# Altium PCB TCA.PcbDoc
Units mm, origin at the board's own origin, x right, y up, seen from the top; angles counter-clockwise.
Board outline 25 x 75 mm, 4 copper layers (L1, L2, L3, L4), stack 1.741 mm thick; 65 components, 35 nets, 205 pads, 23 vias.
Unrouted connection lines stored in the file: 127.
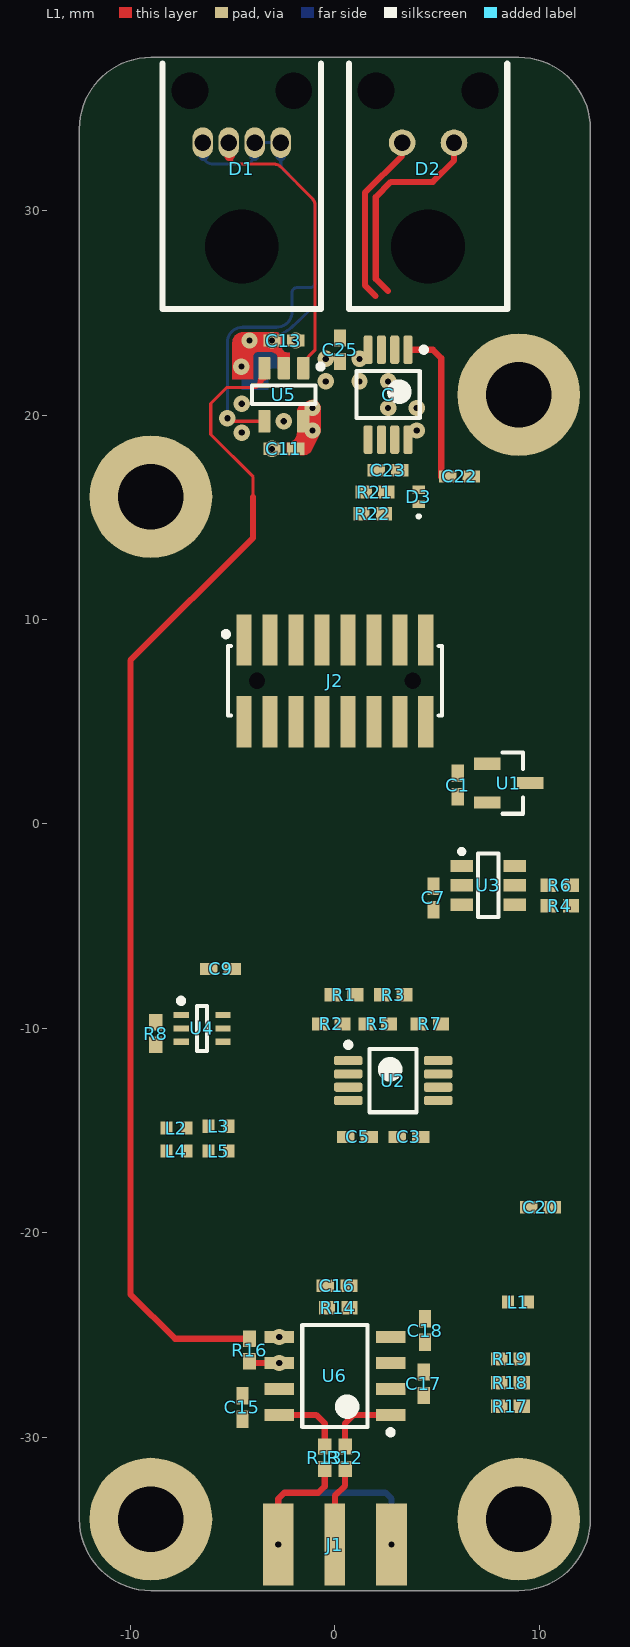
[diagram p0: L1 view]
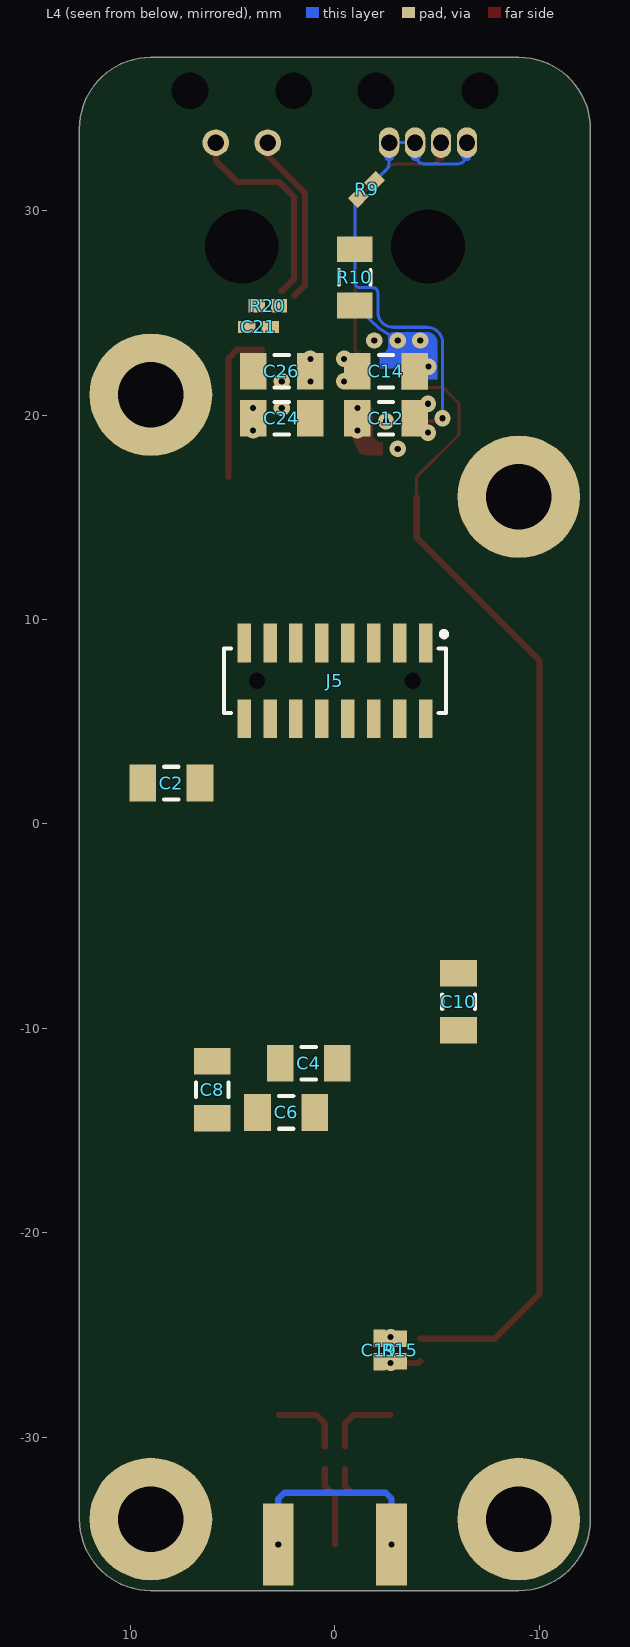
[diagram p1: L4 view, seen from below]
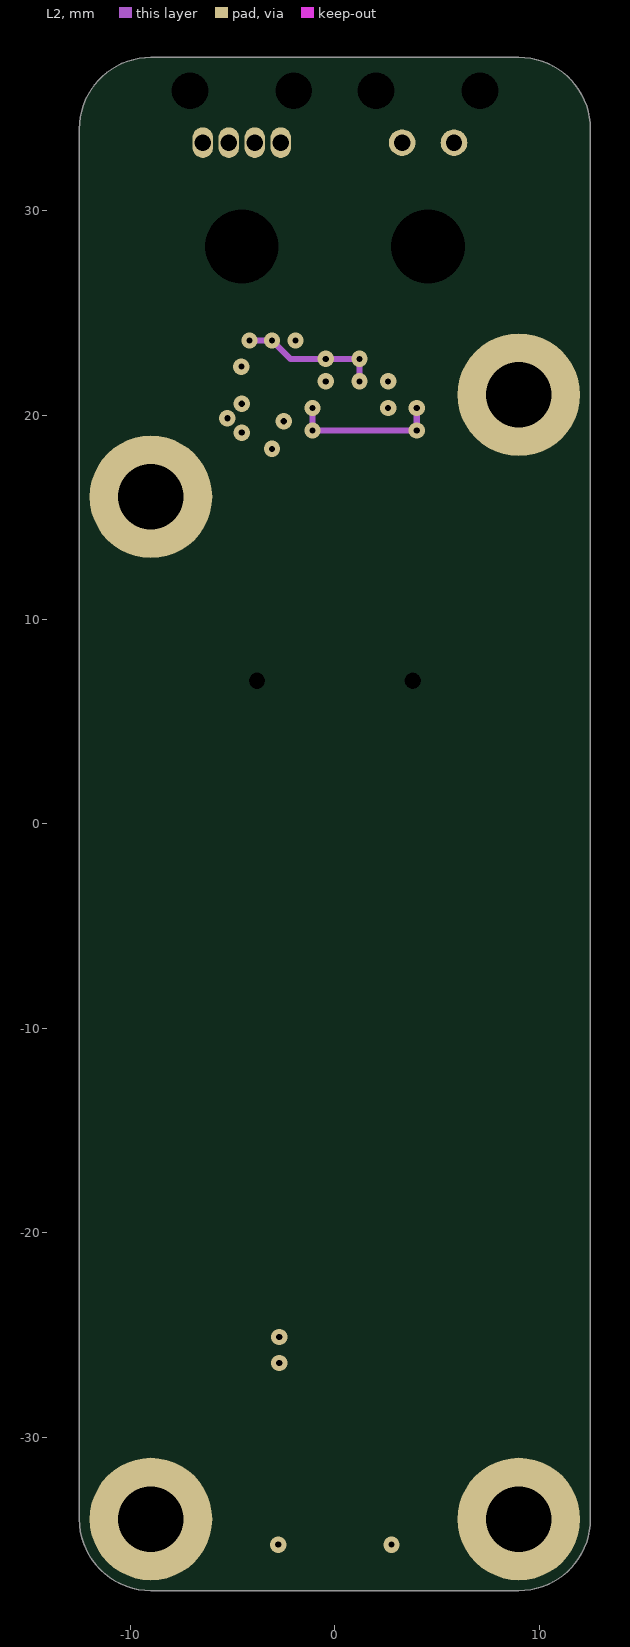
[diagram p2: L2]
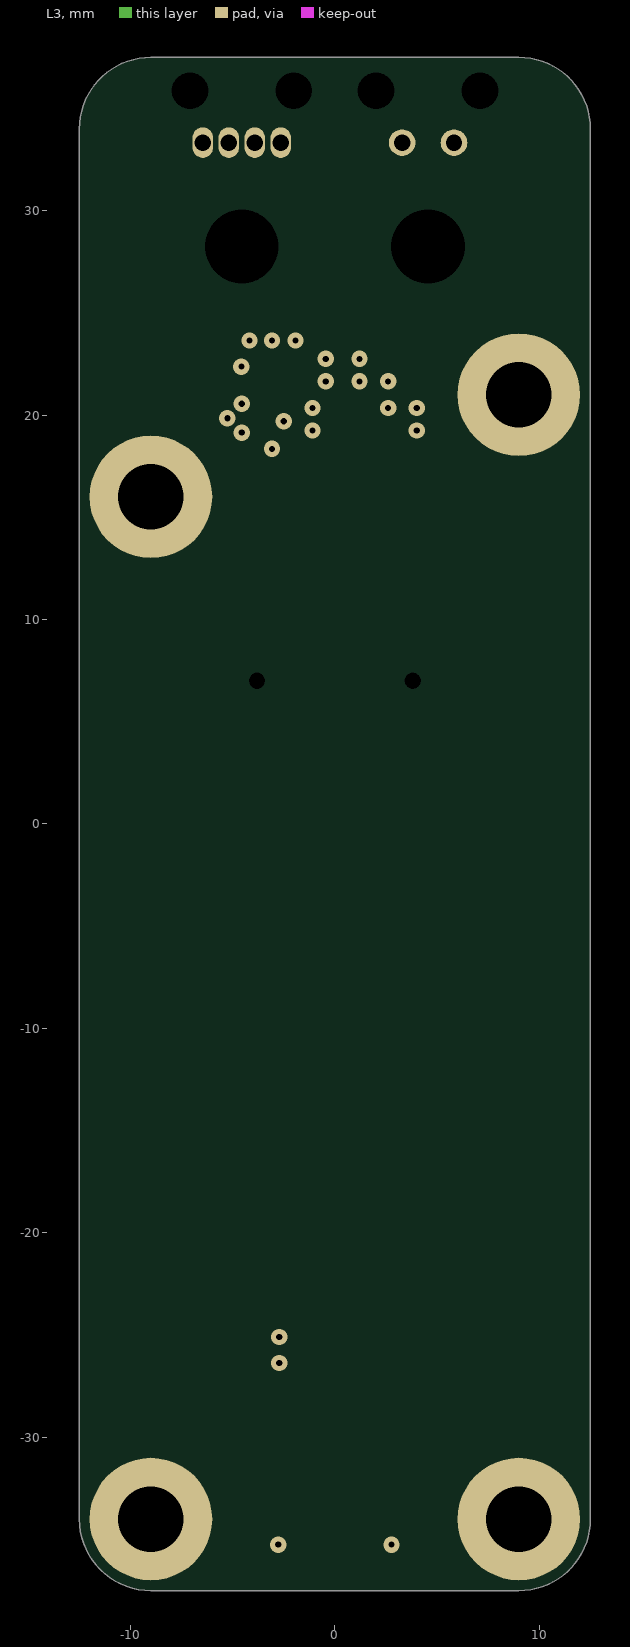
[diagram p3: L3]

## Layer stack, top to bottom
Top Solder: solder mask 0.0102, Solder Resist, Dk 3.5
L1: signal copper 0.0356
Dielectric 2: prepreg 0.1, PP-006, Dk 4.1
L2: signal copper 0.035
Dielectric 1: dielectric 1.4, FR-4, Dk 4.8
L3: signal copper 0.035
Dielectric 3: prepreg 0.1, PP-006, Dk 4.1
L4: signal copper 0.0356
Bottom Solder: solder mask 0.0102, Solder Resist, Dk 3.5

## Board outline
-12.5,-34 -12.5,34 cw(c-9,34) -9,37.5 9,37.5 cw(c9,34) 12.5,34 12.5,-34 cw(c9,-34) 9,-37.5 -9,-37.5 cw(c-9,-34)

## Design rules (kind name [scope] priority, off if disabled: settings)
Clearance [All] p1: gap=0.254 ignorepadtopadclearanceinfootprint=FALSE
PolygonConnect [All] p1: connectstyle=Relief reliefconductorwidth=0.254 reliefentries=4 polygonreliefangle="90 Angle" airgapwidth=0.254
RoutingVias [All] p1: holewidth=0.711 width=1.27 viastyle="Through Hole" minholewidth=0.711 minwidth=1.27 maxholewidth=0.711 maxwidth=1.27
SolderMaskExpansion [All] p1: expansion=0 istentingtop=FALSE
Width [All] p1: maxlimit=1 minlimit=0.15 preferedwidth=0.15
30 further rules are at their usual default settings.

## Classes and differential pairs
net class S50: OUT
component class FE: C15 C16 C17 C18 C19 C20 J1 L1 R12 R13 R14 R15 R16 R17 R18 R19 U6
component class EO: C11 C12 C13 C14 D1 R9 R10 U5
component class DR: C C21 C22 C23 C24 C25 C26 D2 D3 R20 R21 R22
component class CONN: J2 J5 L2 L3 L4 L5
component class AB: C1 C2 C3 C4 C5 C6 C7 C8 C9 C10 R1 R2 R3 R4 R5 R6 R7 R8 U1 U2 U3 U4

## Components (designator, comment, footprint, x,y, rotation, side; value= is the part's Value field where it differs from the comment)
C "LM7332MMX/NOPB" TEXASINSTRUMENTS_PKG_DGK0008A 2.6,21 r270 top (schematic designator U7)
C1 "100n,10%,25V,X7R,0402" CAPC1005X06N 6.014,1.907 r90 top value=100nF
C2 "10u,20%,50V,X5R,1206" CAPC3216X16N 8,2 r180 bottom value=10u
C3 "100n,10%,25V,X7R,0402" CAPC1005X06N 3.621,-15.307 r0 top value=100nF
C4 "10u,20%,50V,X5R,1206" CAPC3216X16N 1.28,-11.699 r180 bottom value=10u
C5 "100n,10%,25V,X7R,0402" CAPC1005X06N 1.113,-15.307 r0 top value=100nF
C6 "10u,20%,50V,X5R,1206" CAPC3216X16N 2.388,-14.107 r180 bottom value=10u
C7 "100n,10%,25V,X7R,0402" CAPC1005X06N 4.817,-3.62 r270 top value=100nF
C8 "10u,20%,50V,X5R,1206" CAPC3216X16N 6,-13 r90 bottom value=10u
C9 "100n,10%,25V,X7R,0402" CAPC1005X06N -5.594,-7.092 r0 top value=100nF
C10 "10u,20%,50V,X5R,1206" CAPC3216X16N -6.05,-8.696 r270 bottom value=10u
C11 "100n,10%,25V,X7R,0402" CAPC1005X06N -2.5,18.35 r0 top value=100nF
C12 "10u,20%,50V,X5R,1206" CAPC3216X16N -2.5,19.85 r0 bottom value=10u
C13 "100n,10%,25V,X7R,0402" CAPC1005X06N -2.5,23.65 r180 top value=100nF
C14 "10u,20%,50V,X5R,1206" CAPC3216X16N -2.5,22.15 r180 bottom value=10u
C15 "100n,10%,25V,X7R,0402" CAPC1005X06N -4.522,-28.535 r90 top value=100nF
C16 "Omit,0402" CAPC1005X06N 0.111,-22.582 r180 top value=Omit
C17 "100n,10%,25V,X7R,0402" CAPC1005X06N 4.351,-27.379 r90 top value=100nF
C18 "100n,10%,25V,X7R,0402" CAPC1005X06N 4.409,-24.784 r90 top value=100nF
C19 "Omit,0402" CAPC1005X06N -2.175,-25.73 r270 bottom value=Omit
C20 "100n,10%,25V,X7R,0402" CAPC1005X06N 10.057,-18.753 r0 top value=100nF
C21 "100n,10%,25V,X7R,0402" CAPC1005X06N 3.733,24.313 r0 bottom value=100nF
C22 "100n,10%,25V,X7R,0402" CAPC1005X06N 6.1,17 r180 top value=100nF
C23 "100n,10%,25V,X7R,0402" CAPC1005X06N 2.6,17.3 r0 top value=100nF
C24 "10u,20%,50V,X5R,1206" CAPC3216X16N 2.6,19.85 r0 bottom value=10u
C25 "100n,10%,25V,X7R,0402" CAPC1005X06N 0.25,23.2 r90 top value=100nF
C26 "10u,20%,50V,X5R,1206" CAPC3216X16N 2.6,22.15 r180 bottom value=10u
D1 "IF-E99B" INDUSTRIALFIBEROPTICS_IF-E99B -4.555,33.33 r0 top locked
D2 "IF D91B" INDUSTRIALFIBEROPTICS_IF-D91B 4.555,33.33 r0 top locked
D3 "CDBQR0130R" DFN65P100X50-2N 4.1,16 r90 top
J1 "CON-SMA-EDGE-S" RFSOLUTIONS_CON-SMA-EDGE-S 0,-35.75 r180 top locked
J2 "HX PZ1.27-2x8P TP" "HANXIA_HX PZ1.27-2x8P TP" 0,7 r90 top locked
J5 "PM127-2-08-S-4.3" HCTL_PM127-2-08-S-4.3 0,7 r270 bottom locked
L1 "470R,0402" INDC1005X05N 8.958,-23.387 r0 top value=470
L2 "470R" INDC1005X05N -7.75,-14.877 r0 top
L3 "470R" INDC1005X05N -5.692,-14.784 r0 top
L4 "470R" INDC1005X05N -7.75,-16 r0 top
L5 "470R" INDC1005X05N -5.692,-16 r0 top
R1 "1k,0.1%,0.063W,0402" RESC1005X04N 0.442,-8.349 r0 top value=1k
R2 "1k,0.1%,0.063W,0402" RESC1005X04N -0.176,-9.783 r0 top value=1k
R3 "1k,0.1%,0.063W,0402" RESC1005X04N 2.85,-8.349 r0 top value=1k
R4 "10k,5%,0.063W,0402" RESC1005X04N 11,-4 r0 top value=10k
R5 "1k,0.1%,0.063W,0402" RESC1005X04N 2.098,-9.783 r0 top value=1k
R6 "10k,5%,0.063W,0402" RESC1005X04N 11,-3 r0 top value=10k
R7 "1k,0.1%,0.063W,0402" RESC1005X04N 4.64,-9.783 r0 top value=1k
R8 "1k,0.1%,0.063W,0402" RESC1005X04N -8.759,-10.25 r90 top value=1k
R9 "0R0,0402" RESC1005X04N -1.547,31.039 r135 bottom value=0
R10 "499R,0.1%,0.52W,1206" VISHAY_PKG_TNPW1206 -0.974,26.739 r90 bottom value=499R
R12 "10R,1%,0.063W,0402" RESC1005X04N 0.5,-31 r90 top value=10R
R13 "10R,1%,0.063W,0402" RESC1005X04N -0.5,-31 r90 top value=10R
R14 "Omit" RESC1005X04N 0.162,-23.66 r180 top
R15 "0R0,0402" RESC1005X04N -3.2,-25.73 r270 bottom value=0
R16 "49R9,1%,0.063W,0402" RESC1005X04N -4.175,-25.73 r90 top value=49R9
R17 "1k,0.1%,0.063W,0402" RESC1005X04N 8.581,-28.483 r0 top value=1k
R18 "1k,0.1%,0.063W,0402" RESC1005X04N 8.581,-27.325 r0 top value=1k
R19 "1k,0.1%,0.063W,0402" RESC1005X04N 8.581,-26.167 r0 top value=1k
R20 "1k,0.1%,0.063W,0402" RESC1005X04N 3.282,25.345 r180 bottom value=1k
R21 "1k,0.1%,0.063W,0402" RESC1005X04N 1.956,16.236 r0 top value=1k
R22 "10k,5%,0.063W,0402" RESC1005X04N 1.85,15.179 r180 top value=10k
U1 "REF3030AIDBZR" SOT95P237X112-3N 8.5,2 r0 top
U2 "LM7332MMX/NOPB" TEXASINSTRUMENTS_PKG_DGK0008A 2.85,-12.55 r0 top
U3 "MCP4725A0T-E/CH" SOTFL95P260X145-6 7.5,-3 r0 top
U4 "LMV7239M7X/NOPB" SOTFL65P210X110-6N -6.5,-10 r0 top
U5 "LMH6609MF/NOPB" TEXASINSTRUMENTS_PKG_DBV0005A -2.5,21 r270 top
U6 "AD8130ARZ" ANALOGDEVICES_PKG_R-8 0,-27 r180 top

## Footprints (in the part's own frame and the unit in brackets; to place one, negate y for a bottom-side part, rotate by r counter-clockwise, add the part's x,y. Pads: shape width x height; smd on the part's side, far side on the other; paste and mask are expansions set on the pad)
ANALOGDEVICES_PKG_R-8 [mm]
  rect 1.45x0.6 smd: 1(-2.725,1.905) 2(-2.725,0.635) 3(-2.725,-0.635) 4(-2.725,-1.905) 5(2.725,-1.905) 6(2.725,-0.635) 7(2.725,0.635) 8(2.725,1.905)
  silkscreen extent -2.85,-2.5 1.6,2.88, body extent -2,-2.5 2,2.5, height 1.75
CAPC1005X06N [mm]
  rect 0.85x0.6 smd: 1(-0.575,0) 2(0.575,0)
  body extent -0.53,-0.28 0.53,0.27, height 0.55
CAPC3216X16N [mm] "Chip Capacitor, 2-Leads, Body 3.20x1.60mm, IPC Medium Density"
  rect 1.3x1.8 smd: 1(-1.4,0) 2(1.4,0)
  silkscreen extent -0.35,-0.8 0.35,0.8, body extent -1.75,-0.95 1.75,0.95, height 1.6
DFN65P100X50-2N [mm] "DFN, 2-Leads, Body 0.60x1.00mm, Pitch 0.65mm, IPC Medium Density"
  rect 0.4x0.6 smd: 1(-0.35,0) 2(0.35,0)
  silkscreen extent -1,-0.05 -0.9,0.05, body extent -0.5,-0.3 0.5,0.3, height 0.5
"HANXIA_HX PZ1.27-2x8P TP" [mm]
  rect 2.5x0.74 smd: 1(2,4.445) 2(-2,4.445) 3(2,3.175) 4(-2,3.175) 5(2,1.905) 6(-2,1.905) 7(2,0.635) 8(-2,0.635) 9(2,-0.635) 10(-2,-0.635) 11(2,-1.905) 12(-2,-1.905) 13(2,-3.175) 14(-2,-3.175) 15(2,-4.445) 16(-2,-4.445)
  silkscreen extent -1.7,-5.23 2.41,5.46, body extent -1.7,-5.23 1.7,5.23, height 4.8
HCTL_PM127-2-08-S-4.3 [mm]
  rect 1.9x0.66 smd: 1(-1.85,4.445) 2(1.85,4.445) 3(-1.85,3.175) 4(1.85,3.175) 5(-1.85,1.905) 6(1.85,1.905) 7(-1.85,0.635) 8(1.85,0.635) 9(-1.85,-0.635) 10(1.85,-0.635) 11(-1.85,-1.905) 12(1.85,-1.905) 13(-1.85,-3.175) 14(1.85,-3.175) 15(-1.85,-4.445) 16(1.85,-4.445)
  round 0 hole 0.8 unplated: ""(0,-3.81) ""(0,3.81)
  silkscreen extent -2.41,-5.43 1.57,5.46, body extent -1.58,-5.43 1.57,5.43, height 4.8
INDC1005X05N [mm] "Chip Inductor, 2-Leads, Body 1.00x0.50mm, IPC Medium Density"
  rect 0.57x0.64 smd: 1(-0.49,0) 2(0.49,0)
  body extent -0.5,-0.25 0.5,0.25, height 0.5
INDUSTRIALFIBEROPTICS_IF-D91B [mm]
  round 1.3 hole 0.8 mask+0: 1(-1.27,0) 2(1.27,0)
  round 0 hole 1.8 unplated mask+0: ""(-2.54,2.54) ""(2.54,2.54)
  round 0 hole 3.6 unplated mask+0: ""(0,-5.08)
  silkscreen extent -3.87,-8.14 3.87,3.86, body extent -4.31,-8.31 4.31,19.44, height 11.3
INDUSTRIALFIBEROPTICS_IF-E99B [mm]
  oval 1x1.5 hole 0.8 mask+0: 1(1.905,0) 2(0.635,0) 3(-0.635,0) 4(-1.905,0)
  round 0 hole 1.8 unplated mask+0: ""(-2.54,2.54) ""(2.54,2.54)
  round 0 hole 3.6 unplated mask+0: ""(0,-5.08)
  silkscreen extent -3.87,-8.14 3.87,3.86, body extent -4.32,-8.31 4.32,19.44, height 11.3
RESC1005X04N [mm] "Chip Resistor, 2-Leads, Body 1.0x0.5mm, IPC Medium Density"
  rect 0.8x0.65 smd: 1(-0.55,0) 2(0.55,0)
  body extent -0.52,-0.27 0.53,0.28, height 0.4
RFSOLUTIONS_CON-SMA-EDGE-S [mm]
  rect 1x4 smd: 1(0,-0.5)
  rect 1.5x4 smd: 2(-2.77,-0.5) 2(2.77,-0.5)
  rect 1.5x4 smd far side: 2(-2.77,-0.5) 2(2.77,-0.5)
  body extent -3.18,-2.06 3.18,11.27, height 3.55
SOT95P237X112-3N [mm] "SOT23, 3-Leads, Body 2.92x2.37mm, Pitch 0.95mm, IPC Medium Density"
  rect 1.3x0.6 smd: 1(-1.05,0.95) 2(-1.05,-0.95) 3(1.05,0)
  silkscreen extent -0.3,-1.5 0.7,1.5, body extent -0.7,-1.52 0.7,1.52, height 1.12
SOTFL65P210X110-6N [mm] "SOT363, 6-Leads, Body 2.2x2.2mm (max), Pitch 0.65mm, IPC Medium Density"
  rect 0.75x0.3 smd: 1(-1.025,0.65) 2(-1.025,0) 3(-1.025,-0.65) 4(1.025,-0.65) 5(1.025,0) 6(1.025,0.65)
  silkscreen extent -1.15,-1.1 0.25,1.47, body extent -0.67,-1.1 0.67,1.1, height 1.1
SOTFL95P260X145-6 [mm] "SOT23, 6-Leads, Body 2.90x2.80mm, Pitch 0.95mm"
  rect 1.1x0.6 smd: 1(-1.3,0.95) 2(-1.3,0) 3(-1.3,-0.95) 4(1.3,-0.95) 5(1.3,0) 6(1.3,0.95)
  silkscreen extent -1.4,-1.55 0.5,1.75, body extent -1.5,-1.53 1.5,1.53, height 1.1
TEXASINSTRUMENTS_PKG_DBV0005A [mm] "SOT23, 5-Leads, Body 2.90x2.80mm, Pitch 0.95mm"
  rrect17% 1.1x0.6 smd mask+0.07: 1(-1.3,0.95) 2(-1.3,0) 3(-1.3,-0.95) 4(1.3,-0.95) 5(1.3,0.95)
  silkscreen extent -1.5,-1.55 0.45,1.93, body extent -1.4,-1.45 1.4,1.45, height 1.2
TEXASINSTRUMENTS_PKG_DGK0008A [mm]
  rrect50% 1.4x0.45 smd: 1(-2.2,0.975) 2(-2.2,0.325) 3(-2.2,-0.325) 4(-2.2,-0.975) 5(2.2,-0.975) 6(2.2,-0.325) 7(2.2,0.325) 8(2.2,0.975)
  silkscreen extent -2.32,-1.55 1.15,1.88, body extent -2.45,-1.55 2.45,1.55, height 1.1
VISHAY_PKG_TNPW1206 [mm]
  rect 1.25x1.75 smd: 1(-1.375,0) 2(1.375,0)
  silkscreen extent -0.35,-0.77 0.35,0.77, body extent -1.65,-0.87 1.65,0.88, height 0.65

## Part data
C U2: library part LM7332MMX_NOPB, "General Purpose Amplifier 2 Circuit Rail-to-Rail 8-VSSOP", Manufacturer 1="Texas Instruments", Vendor 1 Part Number=296-LM7332MMX/NOPBCT-ND, CreatedBy="Judd Foster", HelpURL=https://www.ti.com/lit/ds/symlink/lm7332.pdf?HQS=dis-dk-null-digikeymode-dsf-pf-null-wwe&ts=1730932081789&ref_url=https%253A%252F%252Fwww.ti.com%252Fgeneral%252Fdocs%252Fsuppproductinfo.tsp%253FdistId%253D10%2526gotoUrl%253Dhttps%253A%252F%252Fwww.ti.com%, Manufacturer 1 Part Number=LM7332MMX/NOPB, Part Name=LM7332MMX_NOPB, Vendor 1=DigiKey
C1 C3 C5 C7 C9 C11 C13 C15 C17 C18 C20 C21 C22 C23 C25: library part CAP,Cer,100nF,10%,25V,X7R,0402, "0.1ï¿½F ï¿½10% 25V Ceramic Capacitor X7R 0402 (1005 Metric)", Manufacturer 1="Murata Electronics", Manufacturer 1 Part Number=GRM155R71E104KE14J, Vendor 1 Part Number=490-14603-1-ND, CreatedBy="Judd Foster", HelpURL=https://search.murata.co.jp/Ceramy/image/img/A01X/G101/ENG/GRM155R71E104KE14-01.pdf, Part Name=CAP,Cer,100nF,10%,25V,X7R,0402, Vendor 1=DigiKey
C2 C4 C6 C8 C10 C12 C14 C24 C26: library part CAP,Cer,10uF,50VDC,X5R,1206, "10ï¿½F ï¿½20% 50V Ceramic Capacitor X5R 1206 (3216 Metric)", Manufacturer 1="Samsung Electro-Mechanics", Manufacturer 1 Part Number=CL31A106MBHNNNE, Vendor 1 Part Number=1276-6736-1-ND, CreatedBy="Judd Foster", HelpURL=https://www.samsungsem.com/resources/file/global/support/product_catalog/MLCC.pdf, Part Name=CAP,Cer,10uF,50VDC,X5R,1206, Vendor 1=Digikey
C16 C19: library part CAP,Omit,0402, "Omit", Manufacturer 1=N/A, CreatedBy="Judd Foster", HelpURL=N/A, Manufacturer 1 Part Number=N/A, Part Name=CAP,Omit,0402, Vendor 1=N/A, Vendor 1 Part Number=N/A
D1: library part "XMITTER,FIBER OPTIC,650NM,1.9V,IF-E99B", "Fiber Optic Transmitter 650nm 1.9V 50 mA Connector-less", Manufacturer 1="Industrial Fiber Optics", Vendor 1 Part Number=FB161-ND, CreatedBy="Judd Foster", HelpURL=https://i-fiberoptics.com/pdf/if-e99bdatasheet.pdf, Manufacturer 1 Part Number=IF-E99B, Part Name="XMITTER,FIBER OPTIC,650NM,1.9V,IF-E99B", Vendor 1=DigiKey
D2: library part "RECEIVER,FIBER OPTIC,450-1050NM,IF-D91B", "Fiber Optic Receiver General Purpose 100Mbps", Manufacturer 1="Industrial Fiber Optics", Vendor 1 Part Number=FB200-ND, CreatedBy="Judd Foster", HelpURL=https://i-fiberoptics.com/pdf/ifd91b-1809.pdf, Manufacturer 1 Part Number="IF D91B", Part Name="RECEIVER,FIBER OPTIC,450-1050NM,IF-D91B", Vendor 1=DigiKey
D3: library part DIODE,Schottky,30V,100mA,SMD, "Diode 30 V 100mA Surface Mount 0402C/SOD-923F", Manufacturer 1="Comchip Technology", Vendor 1 Part Number=641-1272-1-ND, CreatedBy="Judd Foster", HelpURL=https://mm.digikey.com/Volume0/opasdata/d220001/medias/docus/3209/CDBQR0130R.pdf, Manufacturer 1 Part Number=CDBQR0130R, Part Name=DIODE,Schottky,30V,100mA,SMD, Vendor 1=Digikey
J1: library part Conn,RF,SMA,Fem,50R,Edge,SMD, "SMA Connector Jack, Female Socket Board Edge, End Launch Solder", Manufacturer 1="RF Solutions", Vendor 1 Part Number=CON-SMA-EDGE-S-ND, CreatedBy="Judd Foster", HelpURL=https://www.rfsolutions.co.uk/content/download-files/CON-SMA-EDGE-6-DATASHEET.pdf, Manufacturer 1 Part Number=CON-SMA-EDGE-S, Part Name=Conn,RF,SMA,Fem,50R,Edge,SMD, Vendor 1=DigiKey
J2: library part "CONN,Hdr,2x8 Pin,1.27mm,SMD", "CONN HEADER 16POS 1.27mm DUAL ROW SMD", Manufacturer 1=hanxia, Vendor 1 Part Number=C41376040, CreatedBy="Judd Foster", HelpURL=https://www.lcsc.com/datasheet/C41376040.pdf?spm=wm.sxq.inf.ggs___wm.fly.bg.0.xh&lcsc_vid=T1ELXwUHQlNYVlZRE1JdXlRQFVgNBF1eTlFXBVxWRAAxVlNeQ1lYVlFUQlNXXjsOAxUeFF5JWBYZEEoKFBINSQcJGk4eFQsCAgIaSgADAwAHC0slRFhZUlVVQ08GEwkK, Manufacturer 1 Part Number="HX PZ1.27-2x8P TP", Part Name="CONN,Hdr,2x8 Pin,1.27mm,SMD", Vendor 1=LCSC
J5: library part "CONN,Rcpt,2x8 Pin,1.27mm,SMD", "CONN SOCKET 16POS 1.27mm DUAL ROW SMD", Manufacturer 1=HCTL, Vendor 1 Part Number=C3975134, CreatedBy="Judd Foster", HelpURL=https://www.lcsc.com/datasheet/C3975134.pdf?spm=wm.sxq.inf.ggs___wm.fly.bg.0.xh&lcsc_vid=T1ELXwUHQlNYVlZRE1JdXlRQFVgNBF1eTlFXBVxWRAAxVlNeQ1lYVldfR1VbXjsOAxUeFF5JWBYZEEoKFBINSQcJGk4dAgUUFAk%3D, Manufacturer 1 Part Number=PM127-2-08-S-4.3, Part Name="CONN,Rcpt,2x8 Pin,1.27mm,SMD", Vendor 1=LCSC
L1 L2 L3 L4 L5: library part Ferrite,470R@100MHz,0402, "470 Ohms @ 100 MHz 1 Power Line Ferrite Bead 0402 (1005 Metric) 1A 200mOhm", Manufacturer 1="Murata Electronics", Manufacturer 1 Part Number=BLM15PX471SN1D, Vendor 1 Part Number=490-10662-1-ND, CreatedBy="Judd Foster", HelpURL=https://www.murata.com/en-us/products/productdata/8796740059166/ENFA0018.pdf, Part Name=Ferrite,470R@100MHz,0402, Vendor 1=Digikey
R1 R2 R3 R5 R7 R8 R17 R18 R19 R20 R21: library part RES,1k,0.1%,0.063W,0402, "1 kOhms Â±0.1% 0.063W, 1/16W Chip Resistor 0402 (1005 Metric) Thin Film", Manufacturer 1=YAGEO, Manufacturer 1 Part Number=RT0402BRE071KL, Vendor 1 Part Number=YAG2306CT-ND, CreatedBy="Judd Foster", HelpURL=https://www.yageo.com/upload/media/product/app/datasheet/rchip/pyu-rt_1-to-0.01_rohs_l.pdf, Part Name=RES,1k,0.1%,0.063W,0402, Vendor 1=DigiKey
R4 R6 R22: library part RES,10k,5%,0.063W,0402, "10 kOhms ï¿½5% 0.063W, 1/16W Chip Resistor 0402 (1005 Metric) Automotive AEC-Q200 Thick Film", Manufacturer 1="Stackpole Electronics Inc", Manufacturer 1 Part Number=RMCF0402JT10K0, Vendor 1 Part Number=RMCF0402JT10K0CT-ND, CreatedBy="Judd Foster", HelpURL=https://www.seielect.com/catalog/sei-rmcf_rmcp.pdf, Part Name=RES,10k,5%,0.063W,0402, Vendor 1=DIgikey
R9 R15: library part RES,0R0,0402, "0 Ohms Jumper 0.1W, 1/10W Chip Resistor 0402 (1005 Metric) Automotive AEC-Q200 Thick Film", Manufacturer 1="Panasonic Electronic Components", Manufacturer 1 Part Number=ERJ-2GE0R00X, Vendor 1 Part Number=P0.0JCT-ND, CreatedBy="Judd Foster", HelpURL=https://industrial.panasonic.com/cdbs/www-data/pdf/RDA0000/AOA0000C301.pdf, Part Name=RES,0R0,0402, Vendor 1=Digikey
R10: library part RES,499R,0.1%,0.52W,1206, "499 Ohms Â±0.1% 0.52W Chip Resistor 1206 (3216 Metric) Anti-Sulfur, Automotive AEC-Q200, Moisture Resistant Thin Film", Manufacturer 1="Vishay Dale", Manufacturer 1 Part Number=TNPW1206499RBEEA, Vendor 1 Part Number=541-3877-1-ND, CreatedBy="Judd Foster", HelpURL=https://www.vishay.com/docs/28758/tnpw_e3.pdf, Part Name=RES,499R,0.1%,0.52W,1206, Vendor 1=DigiKey
R12 R13: library part RES,10R,1%,0.063W,0402, "10 Ohms ï¿½1% 0.063W, 1/16W Chip Resistor 0402 (1005 Metric) Automotive AEC-Q200 Thick Film", Manufacturer 1="Panasonic Electronic Components", Manufacturer 1 Part Number=ERJ-2RKF10R0X, Vendor 1 Part Number=P10.0LCT-ND, CreatedBy="Judd Foster", HelpURL=https://industrial.panasonic.com/cdbs/www-data/pdf/RDA0000/AOA0000C304.pdf, Part Name=RES,10R,1%,0.063W,0402, Vendor 1=Digikey
R14: library part RES,Omit,0402, Manufacturer 1=N/A, CreatedBy="Judd Foster", HelpURL=N/A, Manufacturer 1 Part Number=N/A, Part Name=RES,Omit,0402, Vendor 1=N/A, Vendor 1 Part Number=N/A
R16: library part RES,49R9,1%,0.063W,0402, "49.9 Ohms Â±1% 0.063W, 1/16W Chip Resistor 0402 (1005 Metric) Moisture Resistant Thick Film", Manufacturer 1=YAGEO, Manufacturer 1 Part Number=RC0402FR-0749R9L, Vendor 1 Part Number=311-49.9LRCT-ND, CreatedBy="Judd Foster", HelpURL=https://www.yageo.com/upload/media/product/products/datasheet/rchip/PYu-RC_Group_51_RoHS_L_12.pdf, Part Name=RES,49R9,1%,0.063W,0402, Vendor 1=DigiKey
U1: "3V ï¿½0.2% 3.05V~5.5V 25mA Fixed SOT-23 Voltage References ROHS", Manufacturer 1="Texas Instruments", Vendor 1 Part Number=C38423, CreatedBy="Judd Foster", HelpURL=https://www.ti.com/lit/ds/symlink/ref3030.pdf?ts=1702271215532&ref_url=https%253A%252F%252Fwww.ti.com%252Fproduct%252FREF3030%252Fpart-details%252FREF3030AIDBZR, Manufacturer 1 Part Number=REF3030AIDBZR, Part Name=REF3030AIDBZR, Vendor 1=LCSC
U3: "6us 12 I2C 2.7V~5.5V SOT-23-6 Digital To Analog Converters (DACs) ROHS", Manufacturer 1=Microchip, Vendor 1 Part Number=C144198, CreatedBy="Judd Foster", HelpURL=https://datasheet.lcsc.com/lcsc/1811151442_Microchip-Tech-MCP4725A0T-E-CH_C144198.pdf, Manufacturer 1 Part Number=MCP4725A0T-E/CH, Part Name=MCP4725A0T-E/CH, Vendor 1=LCSC
U4: "Comparator General Purpose Push-Pull SC-70-5", Manufacturer 1="Texas Instruments", Vendor 1 Part Number=296-35198-1-ND, CreatedBy="Judd Foster", HelpURL=https://www.ti.com/general/docs/suppproductinfo.tsp?distId=10&gotoUrl=https%3A%2F%2Fwww.ti.com%2Flit%2Fgpn%2Flmv7235, Manufacturer 1 Part Number=LMV7239M7X/NOPB, Part Name=LMV7239M7X/NOPB, Vendor 1=Digikey
U5: library part LMH6609MF_NOPB, "Voltage Feedback Amplifier 1 Circuit SOT-23-5", Manufacturer 1="Texas Instruments", Vendor 1 Part Number=LMH6609MF/NOPBCT-ND, CreatedBy="Judd Foster", HelpURL=https://www.ti.com/lit/ds/symlink/lmh6609.pdf, Manufacturer 1 Part Number=LMH6609MF/NOPB, Part Name=LMH6609MF_NOPB, Vendor 1=DigiKey
U6: "Differential Amplifier 1 Circuit 8-SOIC", Manufacturer 1="Analog Devices", Vendor 1 Part Number=505-AD8130ARZ-ND, CreatedBy="Judd Foster", HelpURL=https://www.analog.com/media/en/technical-documentation/data-sheets/AD8129_8130.pdf, Manufacturer 1 Part Number=AD8130ARZ, Part Name=AD8130ARZ, Vendor 1=DigiKey

## Free pads (board coordinates)
  round 6 hole 3.2: ""(-9,-34) ""(-9,16) ""(9,-34) ""(9,21)

## Via types
v1: diameter 0.8, hole 0.3, L1 to L4, 23 vias

## Nets (pads, with @x,y where several pads share a name; then routed paths per layer and width w, separated by ;. In a path a pad name is that pad's centre, name@x,y a point inside that pad or via, vN(x,y) a via of type N, cw(c..) or ccw(c..) an arc to the next point about the centre after c; other vN are vias at no path point)
+2V50REF: C2.2 R2.1 R17.2 U1.2
+5V0AMP: C1.2 C3.2 C4.2 C7.2 C9.2 C10.2 C11.2 C12.2 C15.2 C23.2 C24.2 C.8 J2.1 J2.3 J2.5 J5.1 J5.3 J5.5 R4.2 R6.2 U1.1 U2.8 U3.3 U4.5 U5.5 U6.3 U6.7 | length 7.2
  L2 w0.3: v1(-1.1,20.35) v1(-1.1,19.25) v1@3.9,19.25 ; v1(4,19.25) v1(4,20.35)
-5V0AMP: C5.2 C6.2 C13.2 C14.2 C17.1 C25.2 C26.2 C.4 D2.1 J2.11 J2.13 J2.15 J5.11 J5.13 J5.15 R10.1 U2.4 U5.2 U6.2 | length 17.9
  L1 w0.3: 1.984,25.834 1.471,26.347 1.471,30.883 3.285,32.697 D2.1
  L2 w0.3: v1(-4.175,23.65) v1(-3.075,23.65) -2.175,22.75 v1@1.1,22.75 ; v1(1.2,21.65) v1(1.2,22.75)
  L4 w0.15: v1(-3.075,23.65) -2.276,24.17 ccw(c-2.849,25.05) -2.133,24.282 R10.1
  other v1: -4.575,22.375
CMP: L5.2 U4.1
CMPe: J2.14 J5.14
COM: C1.1 C2.1 C3.1 C4.1 C5.1 C6.1 C7.1 C8.1 C9.1 C10.1 C11.1 C12.1 C13.1 C14.1 C15.1 C17.2 C18.1 C20.1 C23.1 C24.1 C25.1 C26.1 C.3 C.5 J2.4 J2.7 J2.8 J2.9 J2.12 J2.16 J5.4 J5.7 J5.8 J5.9 J5.12 J5.16 R8.2 R21.1 R22.2 U1.3 U2.3 U2.5 U3.2 U3.6 U4.2
  other v1: -3.075,18.35 -4.555,19.143 -2.5,19.7 2.6,20.35 -4.555,20.557 -0.45,21.65 2.6,21.65 -0.45,22.75 -1.925,23.65
DIG: D3.1 L2.2 R22.1
DIGe: J2.2 J5.2
IN_N: R13.2 U6.8 | length 3.5
  L1 w0.3: U6.8 -0.92,-28.905 -0.5,-29.325 R13.2
IN_P: R12.2 U6.1 | length 3.5
  L1 w0.3: R12.2 0.5,-29.325 0.92,-28.905 U6.1
NetC16_2: C16.2 C19.1 R14.2 R15.1 U6.5
  other v1: -2.725,-25.095
NetC19_2: C19.2 L1.2 R15.2 R16.1 U6.6 | length 1.5
  L1 w0.3: R16.1 -4.09,-26.365 v1(-2.725,-26.365)
NetC21_1: C21.1 C.2 D2.2 R20.2 | length 10.3
  L1 w0.3: 2.601,26.065 2,26.666 2,30.669 2.743,31.412 4.787,31.412 5.825,32.45 D2.2
NetC21_2: C21.2 C22.1 C.1 R20.1 | length 7.6
  L1 w0.3: C.1 4.796,23.2 5.204,22.793 5.204,16.978
NetC22_2: C22.2 C.6 R21.2
NetD1_1: D1.1 D1.2 D1.4 R9.2 | length 7.7
  L4 w0.15: D1.4 -6.46,32.78 ccw(c-5.96,32.78) -5.96,32.28 -4.42,32.28 ccw(c-4.42,32.78) -3.92,32.78 D1.2 D1.1 -2.65,32.35 ccw(c-2.15,32.35) -2.504,31.996 R9.2
NetD1_3: D1.3 U5.1 | length 14.2
  L1 w0.15: D1.3 -5.19,32.78 ccw(c-4.69,32.78) -4.69,32.28 -2.994,32.28 cw(c-2.994,31.78) -2.641,32.134 -1.121,30.614 cw(c-1.474,30.26) -0.974,30.26 -0.974,23.217 cw(c-1.074,23.217) -1.004,23.146 -1.55,22.6 U5.1
NetD3_2: C.7 D3.2
NetJ1_1: J1.1 R12.1 | length 3.9
  L1 w0.3: J1.1 0,-32.86 0.5,-32.36 R12.1
NetJ1_2: J1.2 R13.1 | length 15.9
  L1 w0.3: v1(-2.77,-35.25) -2.77,-33.01 -2.475,-32.715 -0.815,-32.715 -0.5,-32.4 R13.1
  L4 w0.3: v1(-2.77,-35.25) -2.77,-33.01 -2.475,-32.715 2.475,-32.715 2.77,-33.01 v1(2.77,-35.25)
NetL1_1: L1.1 R19.2
NetR1_1: R1.1 R2.2 U2.2
NetR1_2: R1.2 R3.1 U2.1
NetR3_2: R3.2 R5.1 R7.2 U2.6
NetR7_1: R7.1 U3.1
NetR8_1: R8.1 U4.3
NetR9_1: R9.1 R10.2 U5.4 | length 16.1
  L1 w0.15: v1(-5.262,19.85) -5.112,19.7 U5.4
  L4 w0.15: v1(-5.262,19.85) -5.262,23.55 cw(c-4.513,23.55) -4.513,24.3 -2.849,24.3 ccw(c-2.849,25.05) -2.099,25.05 -2.099,25.989 cw(c-1.849,25.989) -1.849,26.239 -1.224,26.239 ccw(c-1.224,26.489) -0.974,26.489 R10.2 -0.974,30.26 ccw(c-1.474,30.26) R9.1@-1.121,30.614
NetR18_2: R18.2 R19.1
OFFSET: C20.2 R17.1 R18.1 U4.4
OUT: R16.2 U5.3 | length 57.2
  L1 w0.15: -4,16 -4,16.981 -6.074,19.055 -6.074,20.569 -5.293,21.35 -4,21.35 ccw(c-4,21.75) -3.612,21.653 U5.3
  L1 w0.3: R16.2 -7.82,-25.18 -10,-23 -10,8 -4,14 -4,16
REF: C8.2 C16.1 C18.2 R5.2 R14.1 U2.7 U6.4
SCL: L4.2 R6.1 U3.5
SCLe: J2.10 J5.10
SDA: L3.2 R4.1 U3.4
SDAe: J2.6 J5.6
pads on no net: D1. D2. J5. L2.1 L3.1 L4.1 L5.1 U4.6

## Other copper
L1:
  region net OUT: -4,21.275 -4,21.425 ccw(c-4,21.625) -3.808,21.57 -3.758,21.746 ccw(c-3.95,21.801) -3.75,21.801 -3.301,21.801 -3.301,21.75 ccw(c-3.301,21.55) -3.459,21.673 -3.625,21.459 cw(c-4,21.75)
  region net NetD1_3: -5.391,32.601 -5.425,32.694 -4.955,32.866 -4.921,32.772 cw(c-5.156,32.686)
  region net -5V0AMP: -4,21.75 -4,22.85 cw(c-3.75,22.85) -3.75,23.1 -3.15,23.1 cw(c-3.15,22.85) -3.036,23.073 -2.936,23.022 cw(c-3.05,22.799) -2.8,22.799 -2.8,22.3 -2.2,22.3 -2.2,23.05 -2.3,23.05 cw(c-2.3,23.35) -2.6,23.35 -2.6,23.8 ccw(c-2.85,23.8) -2.85,24.05 -4.513,24.05 ccw(c-4.513,23.55) -5.012,23.55 -5.012,21.75
  region net +5V0AMP: -2.35,18.05 -2.35,18.65 ccw(c-2.35,19.15) -1.85,19.15 -1.85,20.199 cw(c-1.45,20.199) -1.608,20.566 -1.258,20.717 cw(c-1.1,20.35) -0.7,20.35 -0.7,19.25 cw(c-1.1,19.25) -0.742,19.071 -1.142,18.271 cw(c-1.5,18.45) -1.5,18.05
L2:
  pour cut-out: -1.25,21.65 ccw(c-1.25,21.75) -1.15,21.75 -1.15,22.85 ccw(c-1.25,22.85) -1.25,22.95 -1.85,22.95 ccw(c-1.85,22.85) -1.95,22.85 -1.95,21.75 ccw(c-1.85,21.75) -1.85,21.65
  pour cut-out: -3.75,21.65 cw(c-3.75,21.75) -3.85,21.75 -3.85,22.85 cw(c-3.75,22.85) -3.75,22.95 -3.15,22.95 cw(c-3.15,22.85) -3.05,22.85 -3.05,21.75 cw(c-3.15,21.75) -3.15,21.65
L3:
  pour cut-out: -1.25,21.65 ccw(c-1.25,21.75) -1.15,21.75 -1.15,22.85 ccw(c-1.25,22.85) -1.25,22.95 -1.85,22.95 ccw(c-1.85,22.85) -1.95,22.85 -1.95,21.75 ccw(c-1.85,21.75) -1.85,21.65
  pour cut-out: -3.75,21.65 cw(c-3.75,21.75) -3.85,21.75 -3.85,22.85 cw(c-3.75,22.85) -3.75,22.95 -3.15,22.95 cw(c-3.15,22.85) -3.05,22.85 -3.05,21.75 cw(c-3.15,21.75) -3.15,21.65
L4:
  region net NetD1_1: -2.9,32.68 -2.9,32.78 -2.4,32.78 -2.4,32.68 cw(c-2.65,32.68)
  region net -5V0AMP: -5.012,21.75 -4.55,21.75 -4.55,21.25 -3.25,21.25 -3.25,22.05 cw(c-3,22.05) -3,22.3 -2.2,22.3 -2.2,23.05 -2.3,23.05 cw(c-2.3,23.35) -2.6,23.35 -2.6,23.8 ccw(c-2.85,23.8) -2.85,24.05 -4.513,24.05 ccw(c-4.513,23.55) -5.012,23.55
  region net NetD1_1: -4.189,32.772 -4.155,32.866 -3.685,32.694 -3.719,32.601 cw(c-3.954,32.686)
  region net NetD1_1: -6.191,32.772 -6.225,32.866 -6.695,32.694 -6.661,32.601 ccw(c-6.426,32.686)

## Silkscreen, mask and mechanical layers (free items; w line width, h text height)
Board Shape:
  the board outline again, w0.05
OL1:
  lines w0.05: -5.425,32.694 -4.955,32.866 -4.921,32.772 cw(c-5.156,32.686) -5.391,32.601 -5.425,32.694 ; -5.012,21.75 -5.012,23.55 cw(c-4.513,23.55) -4.513,24.05 -2.85,24.05 cw(c-2.85,23.8) -2.6,23.8 -2.6,23.35 ccw(c-2.3,23.35) -2.3,23.05 -2.2,23.05 -2.2,22.3 -2.8,22.3 -2.8,22.799 ccw(c-3.05,22.799) -2.936,23.022 -3.036,23.073 ccw(c-3.15,22.85) -3.15,23.1 -3.75,23.1 ccw(c-3.75,22.85) -4,22.85 -4,21.75 -5.012,21.75 ; -4,21.275 ccw(c-4,21.75) -3.625,21.459 -3.459,21.673 cw(c-3.301,21.55) -3.301,21.75 -3.301,21.801 -3.75,21.801 cw(c-3.95,21.801) -3.758,21.746 -3.808,21.57 cw(c-4,21.625) -4,21.425 -4,21.275 ; -2.35,18.05 -2.35,18.65 ccw(c-2.35,19.15) -1.85,19.15 -1.85,20.199 cw(c-1.45,20.199) -1.608,20.566 -1.258,20.717 cw(c-1.1,20.35) -0.7,20.35 -0.7,19.25 cw(c-1.1,19.25) -0.742,19.071 -1.142,18.271 cw(c-1.5,18.45) -1.5,18.05 -2.35,18.05
OL2:
  lines w0.05: -3.85,21.75 ccw(c-3.75,21.75) -3.75,21.65 -3.15,21.65 ccw(c-3.15,21.75) -3.05,21.75 -3.05,22.85 ccw(c-3.15,22.85) -3.15,22.95 -3.75,22.95 ccw(c-3.75,22.85) -3.85,22.85 -3.85,21.75 ; -1.95,21.75 ccw(c-1.85,21.75) -1.85,21.65 -1.25,21.65 ccw(c-1.25,21.75) -1.15,21.75 -1.15,22.85 ccw(c-1.25,22.85) -1.25,22.95 -1.85,22.95 ccw(c-1.85,22.85) -1.95,22.85 -1.95,21.75
OL3:
  lines w0.05: -3.85,21.75 ccw(c-3.75,21.75) -3.75,21.65 -3.15,21.65 ccw(c-3.15,21.75) -3.05,21.75 -3.05,22.85 ccw(c-3.15,22.85) -3.15,22.95 -3.75,22.95 ccw(c-3.75,22.85) -3.85,22.85 -3.85,21.75 ; -1.95,21.75 ccw(c-1.85,21.75) -1.85,21.65 -1.25,21.65 ccw(c-1.25,21.75) -1.15,21.75 -1.15,22.85 ccw(c-1.25,22.85) -1.25,22.95 -1.85,22.95 ccw(c-1.85,22.85) -1.95,22.85 -1.95,21.75
OL4:
  lines w0.05: -6.695,32.694 -6.661,32.601 ccw(c-6.426,32.686) -6.191,32.772 -6.225,32.866 -6.695,32.694 ; -5.012,21.75 -5.012,23.55 cw(c-4.513,23.55) -4.513,24.05 -2.85,24.05 cw(c-2.85,23.8) -2.6,23.8 -2.6,23.35 ccw(c-2.3,23.35) -2.3,23.05 -2.2,23.05 -2.2,22.3 -3,22.3 ccw(c-3,22.05) -3.25,22.05 -3.25,21.25 -4.55,21.25 -4.55,21.75 -5.012,21.75 ; -4.189,32.772 ccw(c-3.954,32.686) -3.719,32.601 -3.685,32.694 -4.155,32.866 -4.189,32.772 ; -2.9,32.68 ccw(c-2.65,32.68) -2.4,32.68 -2.4,32.78 -2.9,32.78 -2.9,32.68

## Text inside footprints (layer, text, board x,y; h text height)
D1: Top Courtyard "PCB EDGE" at -6.255,37.55 h0.5
D2: Top Courtyard "PCB EDGE" at 2.855,37.55 h0.5
J1: Top Courtyard "PCB Edge" at 1.648,-37.717 h0.5 r180